# Altium PCB FeedbackCC1.PcbDoc
Units mm, origin at the board's own origin, x right, y up, seen from the top; angles counter-clockwise.
Board outline 45 x 30 mm, 2 copper layers (Top Layer, Bottom Layer); 30 components, 17 nets, 78 pads, 5 vias.
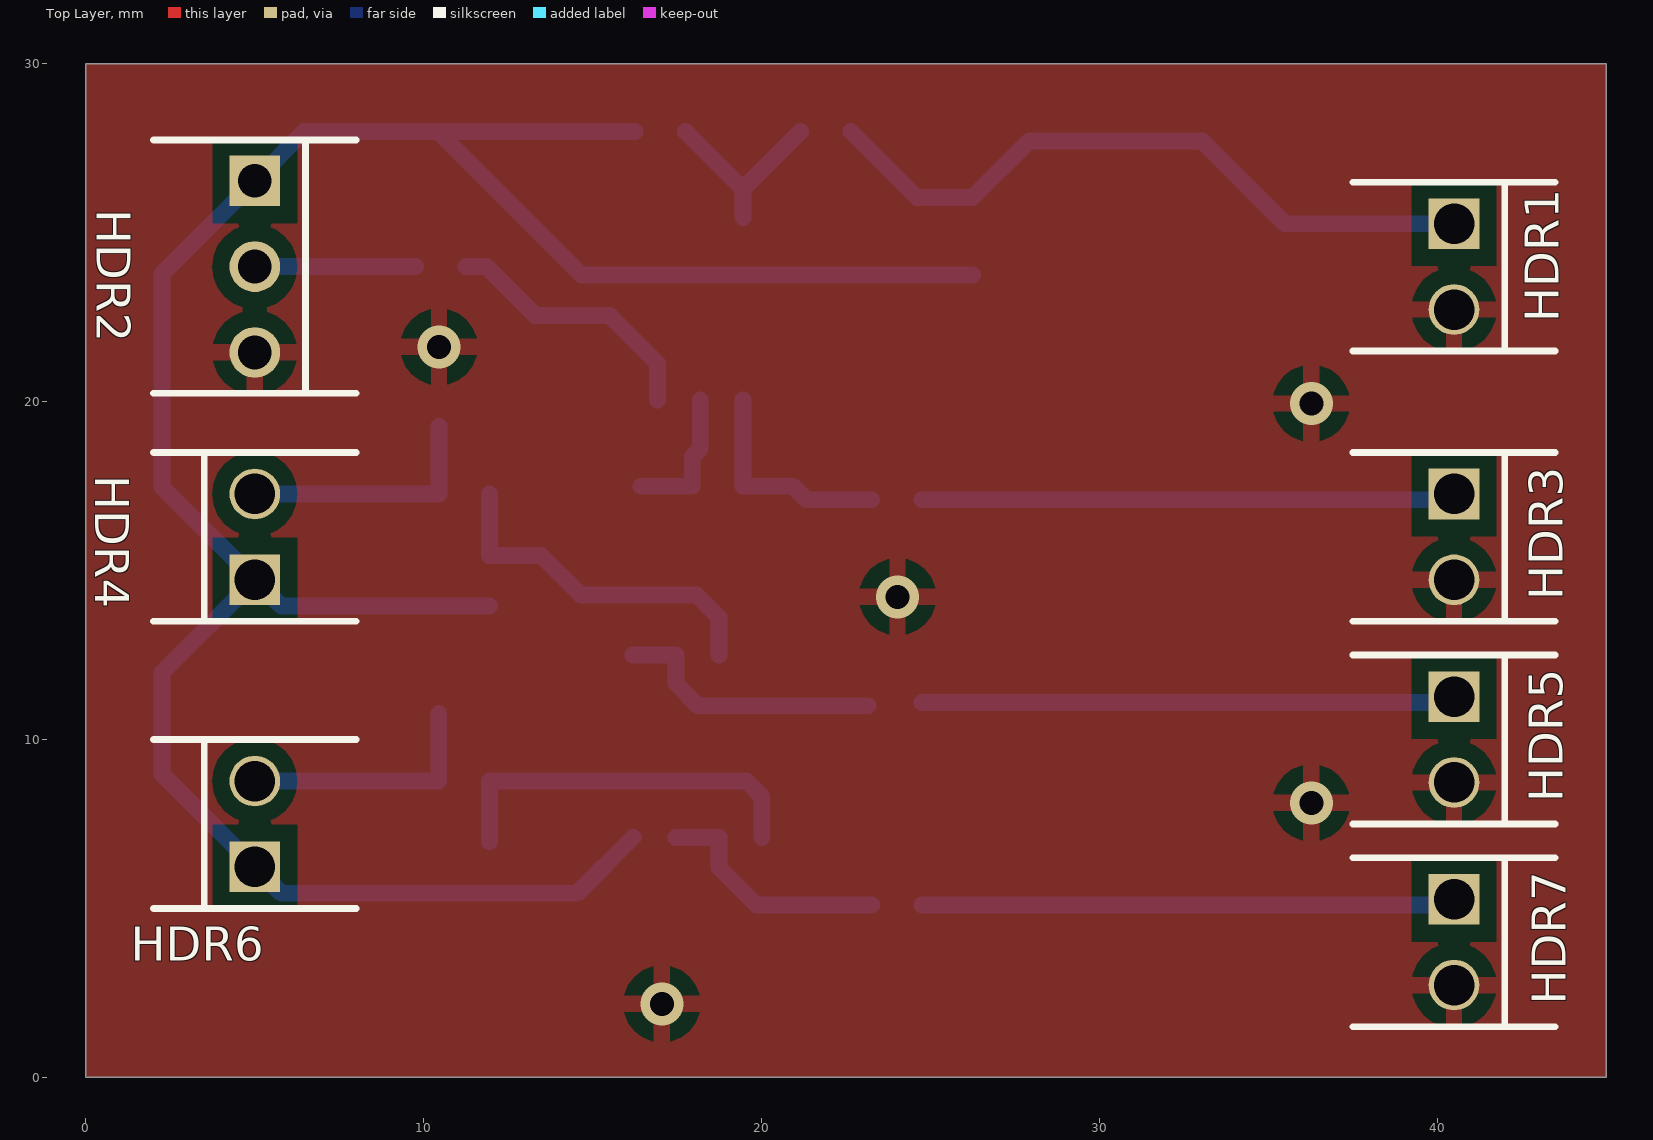
[diagram p0: Top Layer view]
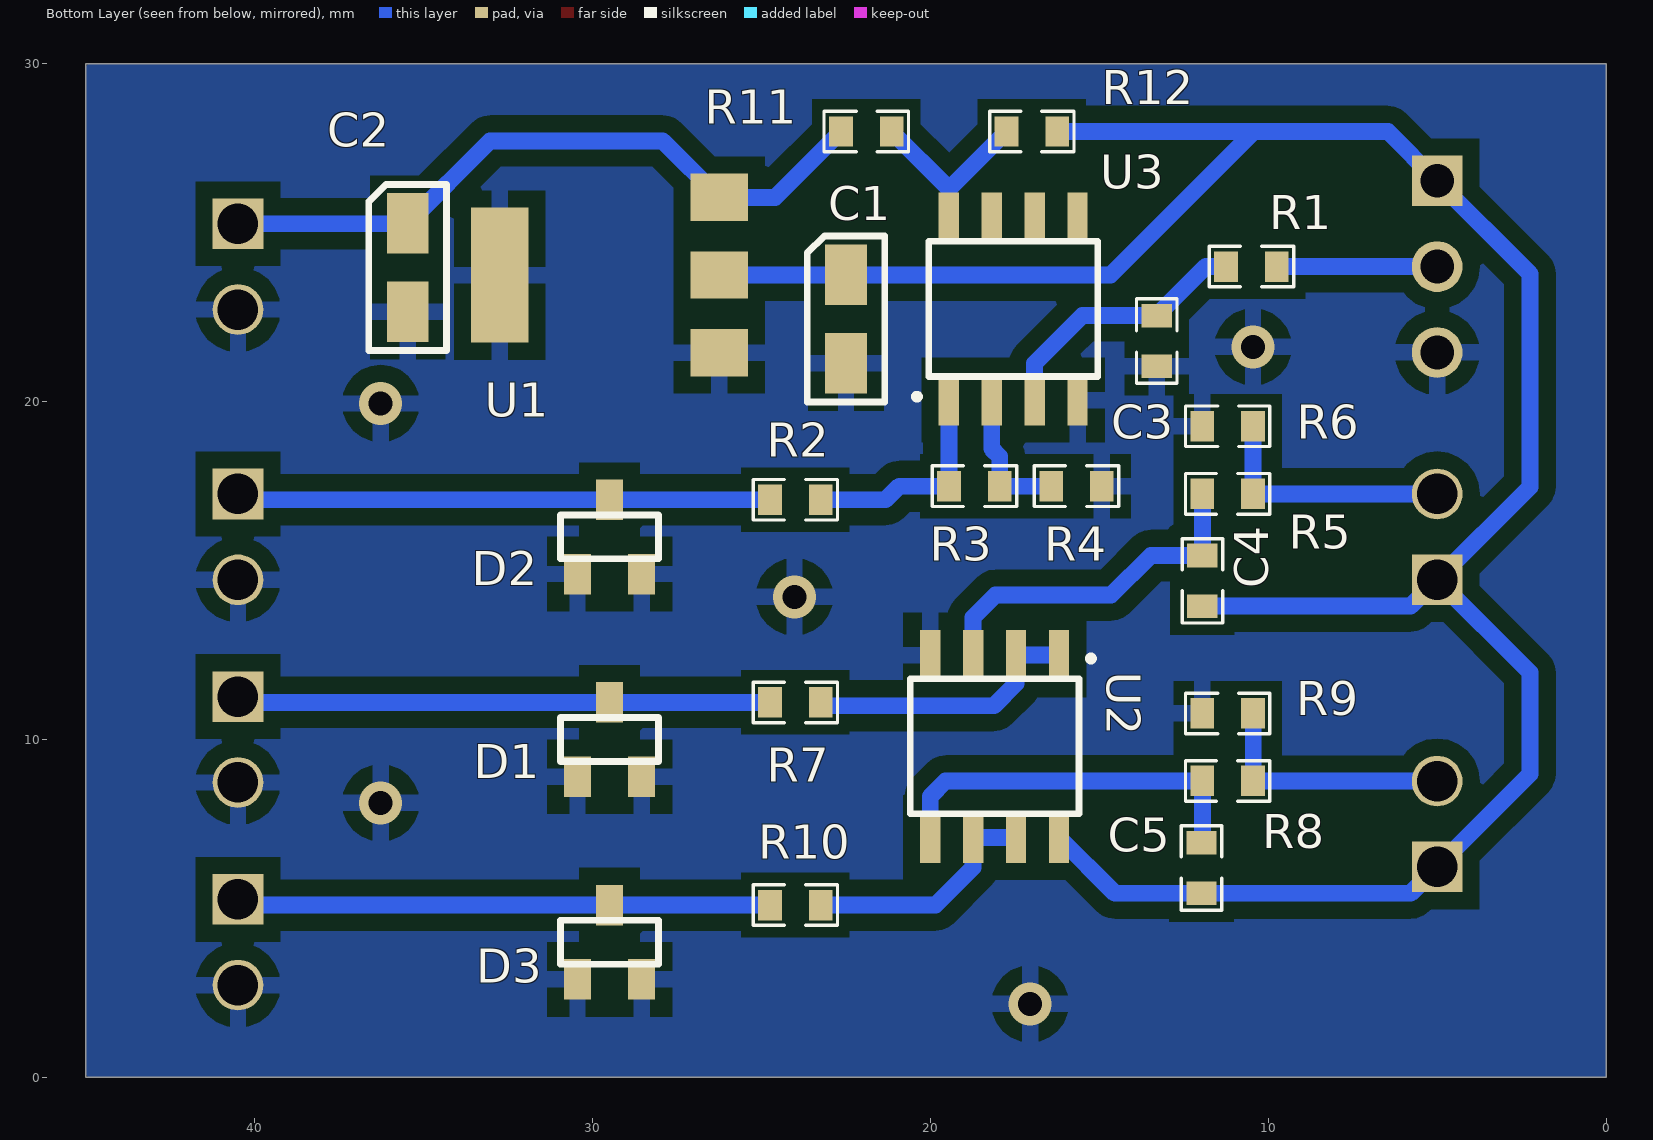
[diagram p1: Bottom Layer view, seen from below]
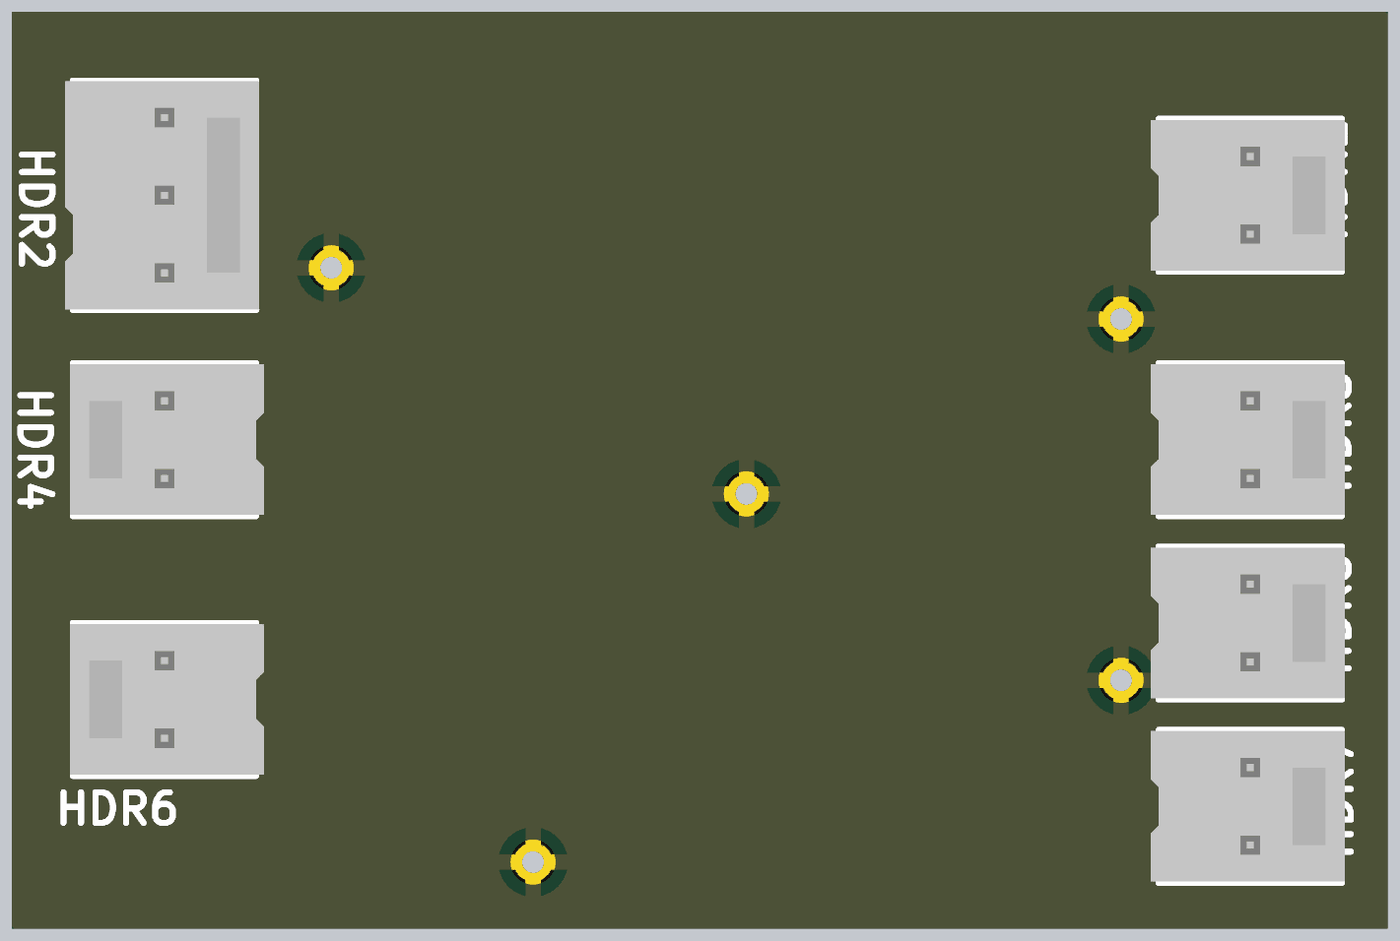
[diagram p2: 3D render of the assembled board from above, using the file's embedded part models]
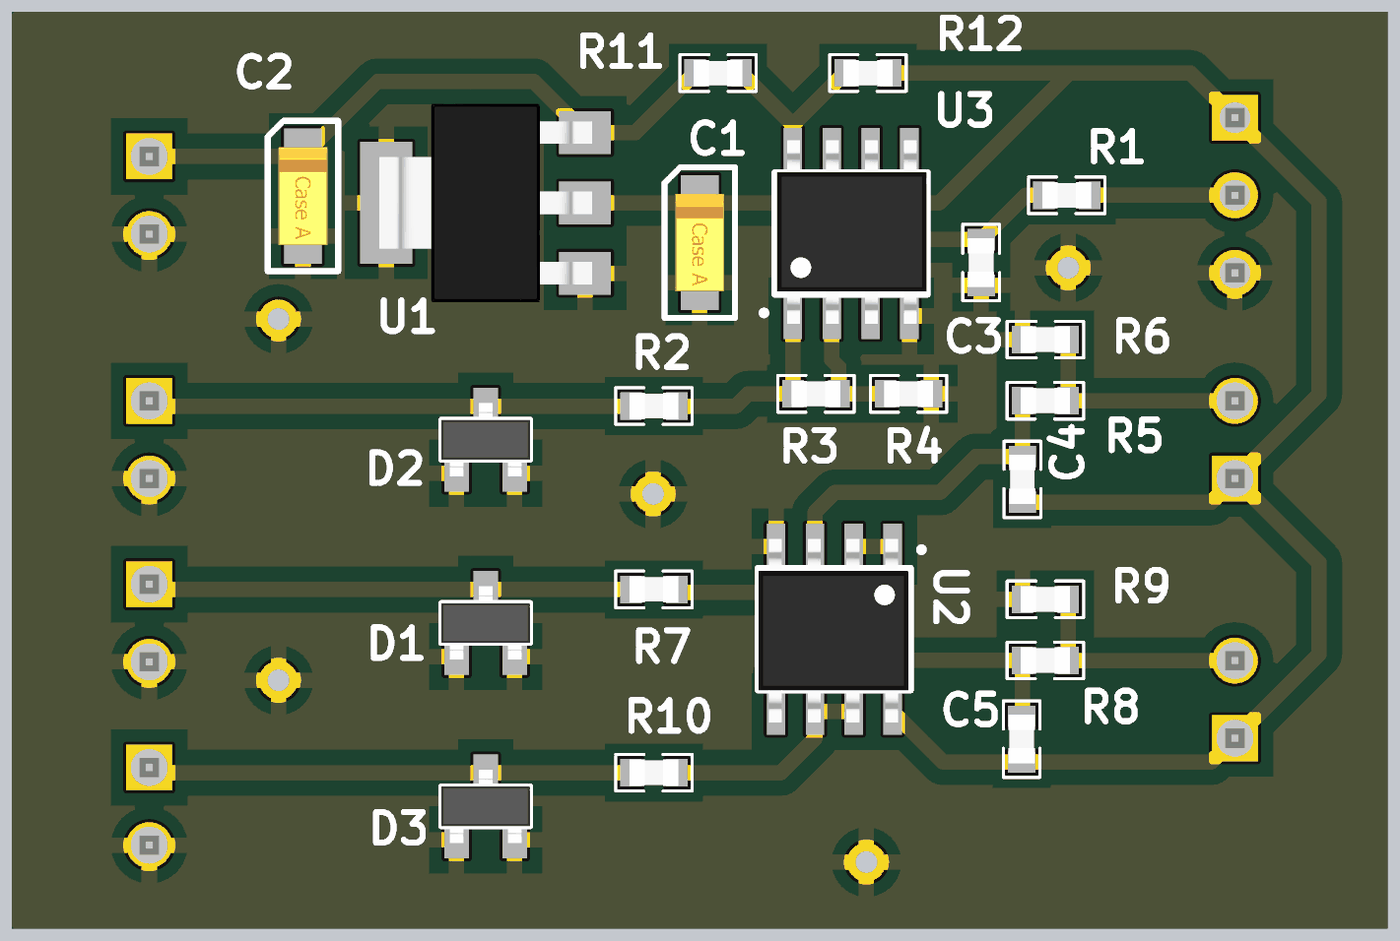
[diagram p3: 3D render of the assembled board from below, using the file's embedded part models]

## Layer stack, top to bottom
Top Solder: solder mask 0.0102, Solder Resist, Dk 3.5
Top Layer: signal copper 0.0356
Dielectric 1: dielectric 0.32, FR-4, Dk 4.8
Bottom Layer: signal copper 0.0356
Bottom Solder: solder mask 0.0102, Solder Resist, Dk 3.5

## Board outline
0,0 45,0 45,30 0,30

## Design rules (kind name [scope] priority, off if disabled: settings)
Clearance [All] p1: gap=0.5
PolygonConnect [All] p1: connectstyle=Relief reliefconductorwidth=0.5 reliefentries=4 polygonreliefangle="90 Angle" airgapwidth=0.5
RoutingVias [All] p1: holewidth=0.711 width=1.27 viastyle="Through Hole" minholewidth=0.711 minwidth=1.27 maxholewidth=0.711 maxwidth=1.27
SolderMaskExpansion [All] p1: expansion=0.102
UnpouredPolygon [All] p1: allowunpoured=FALSE
Width [All] p1: maxlimit=1 minlimit=0.254 preferedwidth=0.5 minimp=50.000000 maximp=50.000000 favimp=50.000000
29 further rules are at their usual default settings.

## Components (designator, comment, footprint, x,y, rotation, side; value= is the part's Value field where it differs from the comment)
C1 "10uF" C-TANTALUM-CASE-A 22.5,22.45 r90 bottom
C2 "10uF" C-TANTALUM-CASE-A 35.475,23.975 r90 bottom
C3 "1uF" 0603 13.3,21.8 r270 bottom
C4 "1uF" 0603 11.95,14.7 r90 bottom
C5 "1uF" 0603 11.975,6.2 r90 bottom
D1 "D. Zener - SOT23-3 2NC" SOT-23-3 29.5,10 r180 bottom
D2 "D. Zener - SOT23-3 2NC" SOT-23-3 29.5,16 r180 bottom
D3 "D. Zener - SOT23-3 2NC" SOT-23-3 29.5,4 r180 bottom
HDR1 "Header 1x2" HEADER-1X2-KK 40.5,24 r270 top
HDR2 "Header 1x3" HEADER-1X3-KK 5,24 r270 top
HDR3 "Header 1x2" HEADER-1X2-KK 40.5,16 r270 top
HDR4 "Header 1x2" HEADER-1X2-KK 5,16 r90 top
HDR5 "Header 1x2" HEADER-1X2-KK 40.5,10 r270 top
HDR6 "Header 1x2" HEADER-1X2-KK 5,7.5 r90 top
HDR7 "Header 1x2" HEADER-1X2-KK 40.5,4 r270 top
R1 "1KR" 0603 10.5,24 r0 bottom
R2 "1KR" 0603 24,17.1 r0 bottom
R3 "1KR" 0603 18.7,17.5 r0 bottom
R4 "1KR" 0603 15.675,17.5 r0 bottom
R5 "47KR" 0603 11.2,17.275 r0 bottom
R6 "10KR" 0603 11.2,19.275 r180 bottom
R7 "1KR" 0603 24,11.1 r0 bottom
R8 "47KR" 0603 11.2,8.775 r0 bottom
R9 "10KR" 0603 11.2,10.775 r180 bottom
R10 "1KR" 0603 24,5.1 r0 bottom
R11 "0R" 0603 21.9,28 r180 bottom
R12 "0R" 0603 17,28 r0 bottom
U1 "VoltReg-5V" SOT-223 29.5,23.75 r90 bottom
U2 "AmpOp-2u" SOIC-8 18.1,9.8 r0 bottom
U3 "AmpOp-2u" SOIC-8 17.55,22.75 r180 bottom

## Footprints (in the part's own frame and the unit in brackets; to place one, negate y for a bottom-side part, rotate by r counter-clockwise, add the part's x,y. Pads: shape width x height; smd on the part's side, far side on the other; paste and mask are expansions set on the pad)
0603 [mm]
  rect 0.7x0.9 smd: 1(-0.75,0) 2(0.75,0)
  silkscreen extent -1.25,-0.6 1.25,0.6, body extent -0.8,-0.43 0.8,0.43, height 0.87
C-TANTALUM-CASE-A [mm]
  rect 1.8x1.23 smd: 1(1.31,0) 2(-1.31,0)
  silkscreen extent -2.46,-1.15 2.46,1.15, body extent -1.6,-0.8 1.6,0.8, height 1.61
HEADER-1X2-KK [mm]
  rect 1.5x1.5 hole 1.2: 1(-1.27,0)
  round 1.5 hole 1.2: 2(1.27,0)
  silkscreen extent -2.5,-3 2.5,3, body extent -2.46,-3.25 2.46,3.1, height 10.68
HEADER-1X3-KK [mm]
  rect 1.5x1.5 hole 1: 1(-2.54,0)
  round 1.5 hole 1: 2(0,0) 3(2.54,0)
  silkscreen extent -3.75,-3 3.75,3, body extent -3.73,-3.25 3.73,3.1, height 10.68
SOIC-8 [mm]
  rect 0.6x1.5 smd: 1(-1.905,-2.7) 2(-0.635,-2.7) 3(0.635,-2.7) 4(1.905,-2.7) 5(1.905,2.7) 6(0.635,2.7) 7(-0.635,2.7) 8(-1.905,2.7)
  silkscreen extent -2.92,-2.67 2.5,2, body extent -2.42,-2.95 2.48,3.05, height 1.75
SOT-23-3 [mm]
  rect 0.8x1.2 smd: 1(-0.95,-1.1) 2(0.95,-1.1) 3(0,1.1)
  silkscreen extent -1.45,-0.65 1.45,0.65, body extent -1.45,-1.2 1.45,1.2, height 1.02
SOT-223 [mm]
  rect 4x1.7 smd: 0(0,3.25)
  rect 1.4x1.7 smd: 1(-2.3,-3.25) 2(0,-3.25) 3(2.3,-3.25)
  body extent -3.25,-3.48 3.25,3.48, height 1.69

## Part data
C1 C2: library part Capacitor-2, "Capacitor"
C3 C4 C5: library part Capacitor-1, "Capacitor"
D1 D2 D3: "Zener Diode SOT23 - 2NC"
HDR1 HDR3 HDR4 HDR5 HDR6 HDR7: "Header 1X2"
HDR2: "Header 1X3"
R1 R2 R3 R4 R5 R6 R7 R8 R9 R10 R11 R12: library part Resistor-1, "Resistor"
U1: "CI Voltage Regulator 5V"
U2 U3: "AmpOp Single Supply IC Rail-to-Rail with 2 units"

## Via types
v1: diameter 1.27, hole 0.711, Top Layer to Bottom Layer, 5 vias

## Nets (pads, with @x,y where several pads share a name; then routed paths per layer and width w, separated by ;. In a path a pad name is that pad's centre, name@x,y a point inside that pad or via, vN(x,y) a via of type N, cw(c..) or ccw(c..) an arc to the next point about the centre after c; other vN are vias at no path point)
GND: C1.2 C2.2 C3.2 D1.1 D1.2 D2.1 D2.2 D3.1 D3.2 HDR1.2 HDR2.3 HDR3.2 HDR5.2 HDR7.2 R4.1 R6.1 R9.1 U1.0 U1.1 U2.4 U3.4
  other v1: 17.05,2.175 36.275,8.125 24.025,14.225 36.275,19.95 10.45,21.625
NetC3_1: C3.1 R1.2 U3.3 | length 7.9
  Bottom Layer w0.5: R1.2 11.85,24 C3.1 15.5,22.55 16.915,21.135 U3.3
NetC4_2: C4.2 R5.2 U2.3 | length 10.5
  Bottom Layer w0.5: R5.2 C4.2 13.475,15.45 14.65,14.275 18.075,14.275 18.735,13.615 U2.3
NetC5_2: C5.2 R8.2 U2.5 | length 11.3
  Bottom Layer w0.5: C5.2@11.95,6.975 R8.2 19.55,8.775 20.005,8.32 U2.5
NetD1_3: D1.3 HDR5.1 R7.2 | length 15.6
  Bottom Layer w0.5: R7.2 HDR5.1@40.33,11.1
NetD2_3: D2.3 HDR3.1 R2.2 | length 15.8
  Bottom Layer w0.5: R2.2 40.33,17.1 HDR3.1
NetD3_3: D3.3 HDR7.1 R10.2 | length 15.8
  Bottom Layer w0.5: R10.2 D3.3 40.33,5.1 HDR7.1
NetHDR2_2: HDR2.2 R1.1 | length 4.7
  Bottom Layer w0.5: HDR2.2 R1.1
NetHDR4_2: HDR4.2 R5.1 R6.2 | length 7.5
  Bottom Layer w0.5: HDR4.2 10.445,17.27 R5.1 R6.2
NetHDR6_2: HDR6.2 R8.1 R9.2 | length 7.4
  Bottom Layer w0.5: HDR6.2 10.445,8.77 R9.2@10.445,10.77
NetR2_1: R2.1 R3.2 U3.1 | length 6.5
  Bottom Layer w0.5: R3.2 20.925,17.5 21.325,17.1 R2.1 ; R3.2@19.455,17.505 U3.1
NetR3_1: R3.1 R4.2 U3.2 | length 4.2
  Bottom Layer w0.5: R4.2 R3.1 17.95,18.375 18.185,18.61 U3.2
NetR7_1: R7.1 U2.1 U2.2 | length 8.1
  Bottom Layer w0.5: U2.1 U2.2 17.465,11.659 18.124,11 R7.1@23.15,11
NetR10_1: R10.1 U2.6 U2.7 | length 7.1
  Bottom Layer w0.5: U2.7 U2.6 18.735,6.215 19.85,5.1 R10.1
NetR11_2: R11.2 R12.2 U3.8 | length 5.7
  Bottom Layer w0.5: R12.2 19.455,26.295 ; U3.8 19.455,26.295 ; R11.2 19.455,26.305 19.455,26.295
VCC: C1.1 C4.1 C5.1 HDR2.1 HDR4.1 HDR6.1 R12.1 U1.2 U2.8 | length 73.8
  Bottom Layer w0.5: C4.1 5.78,13.95 HDR4.1 ; U2.8 14.545,5.45 C5.1 5.78,5.45 HDR6.1 2.25,8.98 2.25,11.98 HDR4.1 ; R12.1 10.425,28 ; U1.2 22.5,23.75 14.675,23.75 10.425,28 ; HDR4.1 2.25,17.48 2.25,23.79 HDR2.1 6.46,28 10.425,28
VIN: C2.1 HDR1.1 R11.1 U1.3 | length 20.4
  Bottom Layer w0.5: R11.1 24.6,26.05 U1.3 27.925,27.725 33.035,27.725 C2.1 35.49,25.27 HDR1.1
pads on no net: U3.5 U3.6 U3.7

## Polygon pours and split planes (outlines as drawn)
GND on Bottom Layer "GND" (solid, remove dead copper, pour order 7): 45,30 0,30 0,0 0.45,0 45,0
GND on Top Layer "GND" (solid, pour order 3): 0,30 0,0 45,0 45,30